# EAGLE board rgb-led_alt (EAGLE 7.6.0)
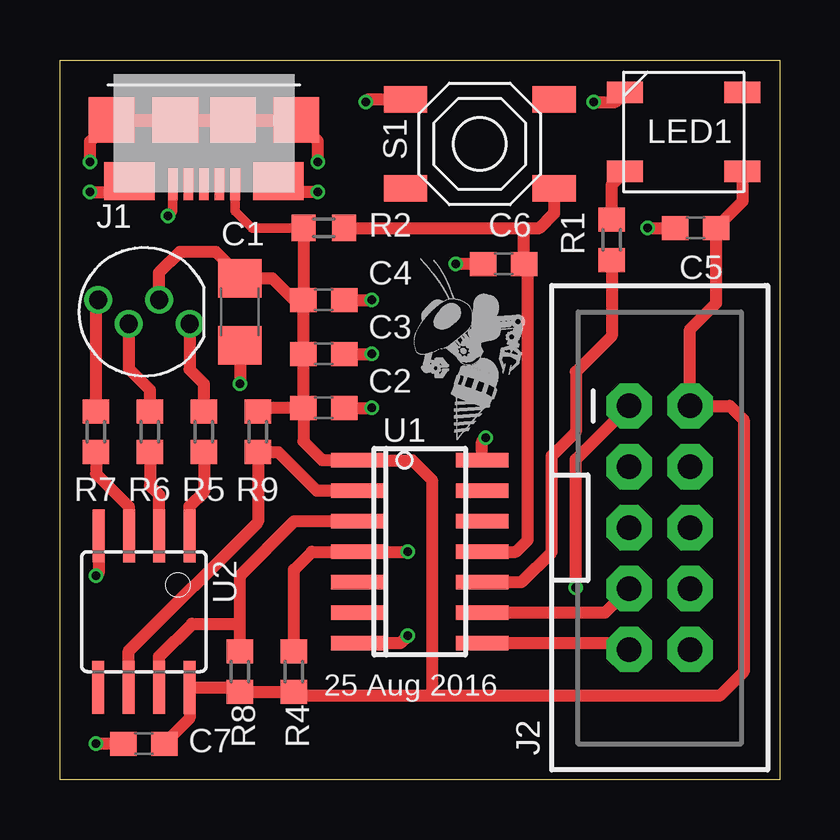
[diagram p0: board, top side]
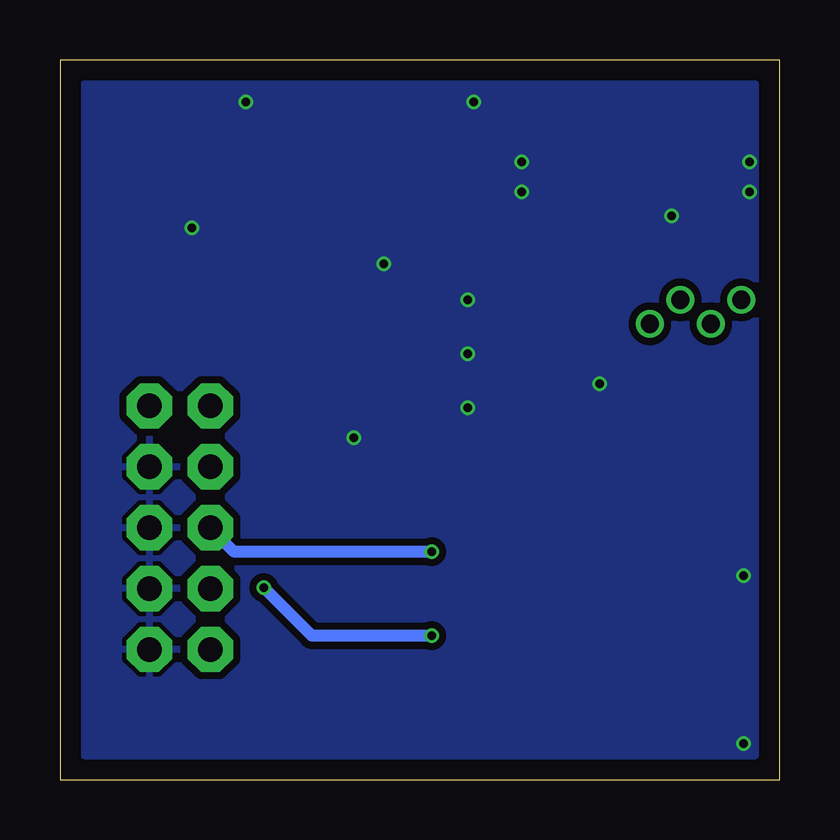
[diagram p1: board, bottom side, seen from below]

Size 30 x 30 mm. Coordinates in mm from the lower left corner, seen from the top.
Outline: 0,0 0,30 30,30 30,0 0,0
Copper layers (1*16): Top 0.035mm / dielectric 1.55mm / Bottom 0.035mm
Design rules "eC_2Layer_PClass6_BaseCopperO35 *": minimum track width 0.15mm, minimum drill 0.35mm, track to track 0.175mm, track to pad 0.175mm, pad to pad 0.175mm, via to via 0.175mm, smd to smd 0mil, copper to edge 0.25mm, drill to drill 0.35mm, minimum pad ring 0.2mm, minimum via ring 0.125mm, stop-mask expansion 0mil, vias tented up to drill 0.45mm, thermal gap 0.2mm
Net classes: 0 default: width 0.203 mm; 1 PWR: width 0.254 mm

## Footprints (pad centres in the part's own frame; a part is rotated, then mirrored left to right if it is on the bottom)
C1206 = smd 1.6 x 1.8: 1 -1.4,0; 2 1.4,0
C0603 = smd 1.1 x 1: 1 -0.85,0; 2 0.85,0
LED-RGB-THRU = drill 0.762: 1 1.905,-0.5; 2 0.635,0.5; 3 -0.635,-0.5; 4 -1.905,0.5
GS-14-2180 = smd 0.4 x 1.35: 1 -1.3,2.675; 2 -0.65,2.675; 3 0,2.675; 4 0.65,2.675; 5 1.3,2.675 | smd 2.1 x 1.6: 5@1 3.1,2.55; 5@7 -3.1,2.55 | smd 1.9 x 1.9: 5@2 3.85,0; 5@3 1.2,0; 5@4 -1.2,0; 5@6 -3.85,0
2X5-SHROUDED = drill 1.016 pad 1.88 octagon: 1 -1.27,5.08; 2 1.27,5.08; 3 -1.27,2.54; 4 1.27,2.54; 5 -1.27,0; 6 1.27,0; 7 -1.27,-2.54; 8 1.27,-2.54; 9 -1.27,-5.08; 10 1.27,-5.08
5050 = smd 1.5 x 0.9: 1 -2.45,1.65; 2 -2.45,-1.65; 3 2.45,-1.65; 4 2.45,1.65
R0603 = smd 1 x 1.1: 1 -0.85,0; 2 0.85,0
SW4-SMD-5.2X5.2X1.5MM = smd 1.8 x 1.1: 1 -3.1,1.85; 2 3.1,1.85; 3 3.1,-1.85; 4 -3.1,-1.85
SOIC-14 = smd 0.6 x 2.2: 1 -3.81,-2.6; 2 -2.54,-2.6; 3 -1.27,-2.6; 4 0,-2.6; 5 1.27,-2.6; 6 2.54,-2.6; 7 3.81,-2.6; 8 3.81,2.6; 9 2.54,2.6; 10 1.27,2.6; 11 0,2.6; 12 -1.27,2.6; 13 -2.54,2.6; 14 -3.81,2.6
SOIC8 = smd 0.5 x 2.2: 1 -1.905,-3.154; 2 -0.645,-3.154; 3 0.625,-3.154; 4 1.895,-3.154; 5 1.905,3.154; 6 0.635,3.154; 7 -0.635,3.154; 8 -1.905,3.154

## Placement (x,y rotation side)
C1  47uF  [C1206]  7.5,19.5 270 top
C2  0.1uF  [C0603]  11,15.5 0 top
C3  0.1uF  [C0603]  11,17.75 0 top
C4  0.1uF  [C0603]  11,20 0 top
C5  0.1uF  [C0603]  26.5,23 180 top
C6  0.1uF  [C0603]  18.5,21.5 180 top
C7  0.1uF  [C0603]  3.5,1.5 180 top
D1  LED-RGB-CA-THRUCLEAR  [LED-RGB-THRU]  3.5,19.5 0 top
J1  MICRO-USB  [GS-14-2180]  6,27.5 180 top
J2  AVR_SPI_PROG2PTH2  [2X5-SHROUDED]  25,10.5 0 top
LED1  WS2812B  [5050]  26,27 180 top
R1  220  [R0603]  23,22.5 270 top
R2  10k  [R0603]  11,23 180 top
R4  10k  [R0603]  9.75,4.5 270 top
R5  [R0603]  6,14.5 90 top
R6  [R0603]  3.75,14.5 90 top
R7  [R0603]  1.5,14.5 90 top
R8  10k  [R0603]  7.5,4.5 270 top
R9  10k  [R0603]  8.25,14.5 90 top
S1  SKQGADE010  [SW4-SMD-5.2X5.2X1.5MM]  17.5,26.5 180 top
U1  ATTINY441/841SSU/SSUR  [SOIC-14]  15,9.5 270 top
U2  PCA9533  [SOIC8]  3.5,7 180 top
U$2  [ROBOBUZZ_0.4X]  16.53,14.16 0 top

## Library data of the parts
C1-C7 R1 = rcl
D1 = rgb-led; PROD_ID: DIO-10631
J1 J2 LED1 U1 = rgb-led
R2 R4-R9 = resistor
S1 = Seeed-OPL-Button; MPN: SKQGADE010
U2 = adam - ics
U$2 = RoboJackets-Aesthetics

## Nets
!BTN: C6.1 R2.1 S1.1 U1.11
!RESET: J2.5 R4.1 U1.4
+5V [PWR]: C1.1 C2.1 C3.1 C4.1 C5.1 C7.1 D1.2 J1.1 J2.2 LED1.1 R2.2 R4.2 R8.2 R9.2 U1.1 U2.8
GND: C1.2 C2.2 C3.2 C4.2 C5.2 C6.2 C7.2 J1.5 J1.5@1 J1.5@2 J1.5@3 J1.5@4 J1.5@6 J1.5@7 J2.4 J2.6 J2.8 J2.10 LED1.3 S1.3 U1.14 U2.4
LED_CNTRL: R1.2 U1.10
MISO: J2.9 U1.8
MOSI: J2.1 U1.7
N$1: LED1.4 R1.1
N$6: D1.1 R5.2
N$9: D1.3 R6.2
N$10: D1.4 R7.2
N$11: R5.1 U2.1
N$12: R6.1 U2.2
N$13: R7.1 U2.3
SCK: J2.7 U1.9
SCL: R9.1 U1.2 U2.6
SDA: R8.1 U1.3 U2.7

## Tracks (layer width: path | path; a pad name or v marks a point on that pad's centre or on a via)
!BTN
  Top 0.5: U1.11 19,9.5 19.5,10 19.5,21.35 C6.1 19.35,23 | S1.1 20.6,23.6 20,23 19.35,23 | R2.1 19.35,23
!RESET  (via drill 0.35)
  Top 0.5: R4.1 9.75,8.75 10.5,9.5 U1.4 v14.5,9.5
  Bottom 0.5: v14.5,9.5 22.73,9.5 J2.5
+5V
  Top 0.4: J1.1 7.3,23.7 8,23 R2.2
  Top 0.5: C2.1 C3.1 C4.1 | C7.1 5.41,2.56 U2.8 7.3,3.85 R8.2 R4.2 9.9,3.5 15.5,3.5 | 15.5,3.5 15.5,12.5 14.69,13.31 U1.1 10.94,13.31 10.15,14.1 C2.1 | C2.1 8.4,15.5 R9.2 | R2.2 C4.1 | LED1.1 28.45,24.1 C5.1 27.35,19.85 26.27,18.77 J2.2 27.92,15.58 28.5,15 28.5,4.5 27.5,3.5 15.5,3.5 | D1.2 4.13,21.14 5,22 6.5,22 7.5,21 C1.1 8.85,20.9 9.75,20 C4.1
GND  (via drill 0.35)
  Top 0.4: J1.5 4.7,23.7 v4.5,23.5
  Top 0.5: U1.14 17.6,14.1 v17.75,14.25 | C7.2 v1.5,1.5 | U2.4 1.6,8.61 v1.5,8.5 | v24.5,23 C5.2 | v22.25,28.25 23.15,28.25 LED1.3 | C6.2 v16.5,21.5 | S1.3 12.85,28.35 v12.75,28.25 | v10.75,25.75 10.75,26.6 J1.5@6 J1.5@4 J1.5@3 J1.5@2 1.25,26.6 v1.25,25.75 | v1.25,24.5 2.45,24.5 J1.5@1 | v10.75,24.5 9.55,24.5 J1.5@7 | C4.2 v13,20 | C3.2 v13,17.75 | C2.2 v13,15.5 | C1.2 v7.5,16.5
  pour Bottom (isolate 0.3, rank 6): 1,1 1,29 29,29 29,1
LED_CNTRL
  Top 0.5: U1.10 19.23,8.23 20.5,9.5 20.5,13.5 21.5,14.5 21.5,17 23,18.5 R1.2
MISO
  Top 0.5: U1.8 23.46,5.69 J2.9
MOSI  (via drill 0.35)
  Top 0.5: U1.7 14.19,5.69 v14.5,6 | v21.5,8 21.5,13.35 J2.1
  Bottom 0.5: v14.5,6 19.5,6 v21.5,8
N$1
  Top 0.5: R1.1 23,24.8 LED1.4
N$6
  Top 0.5: R5.2 6,16.5 5.41,17.09 D1.1
N$9
  Top 0.5: R6.2 3.75,16.25 2.87,17.14 D1.3
N$10
  Top 0.5: R7.2 1.5,19.91 D1.4
N$11
  Top 0.5: U2.1 5.41,11.4 6,12 R5.1
N$12
  Top 0.5: U2.2 4.14,11.86 3.75,12.25 R6.1
N$13
  Top 0.5: U2.3 2.88,11.38 1.5,12.75 R7.1
SCK
  Top 0.5: U1.9 22.73,6.96 J2.7
SCL
  Top 0.5: U2.6 2.87,5.37 8.25,10.75 R9.1 9.1,13.65 10.71,12.04 U1.2
SDA
  Top 0.5: R8.1 7.5,6.5 | 7.5,6.5 7.5,8.5 9.77,10.77 U1.3 | U2.7 4.13,5.13 5.5,6.5 7.5,6.5

## Text on the board
tPlace: 25 Aug 2016
tNames: J1 | J2